# EAGLE board Outlet_Sensor (EAGLE 7.5.0)
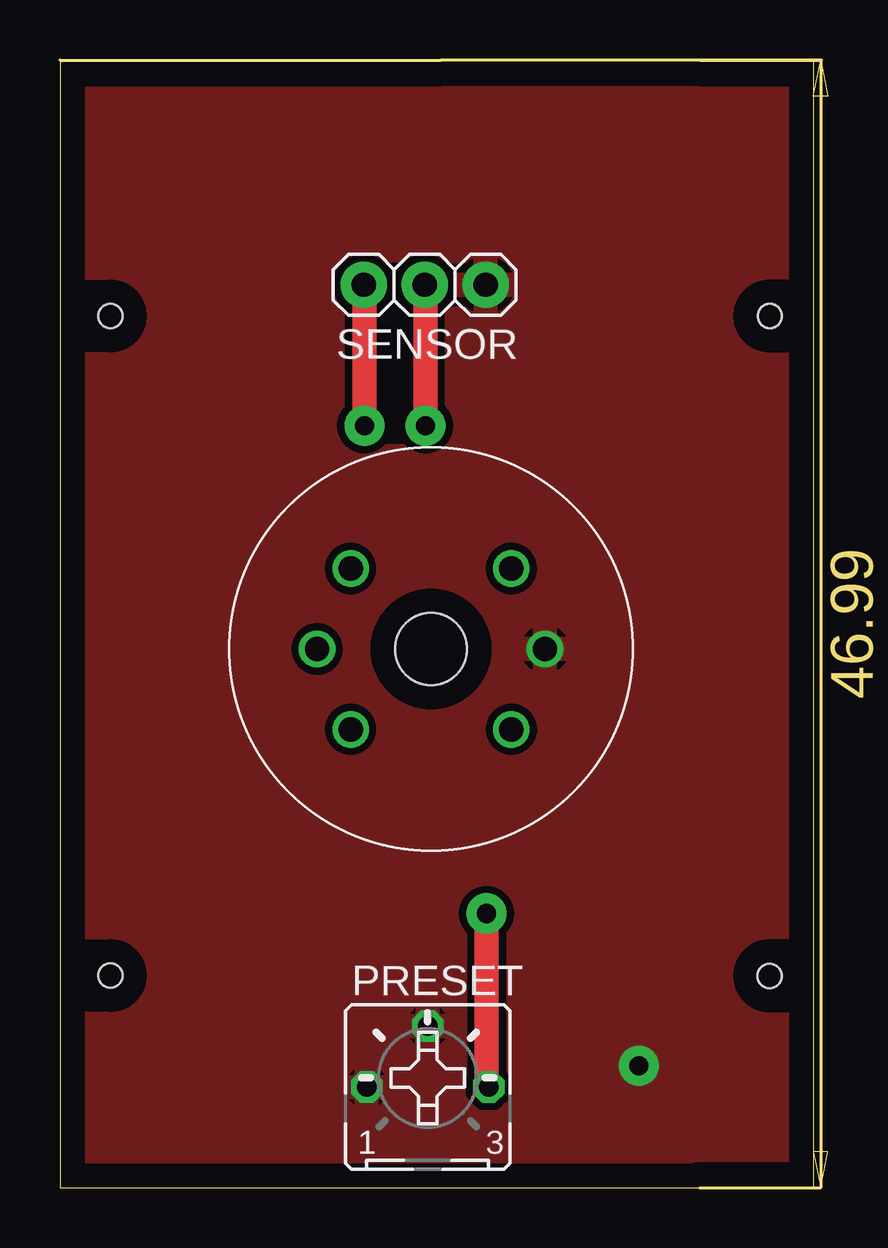
[diagram p0: board, top side]
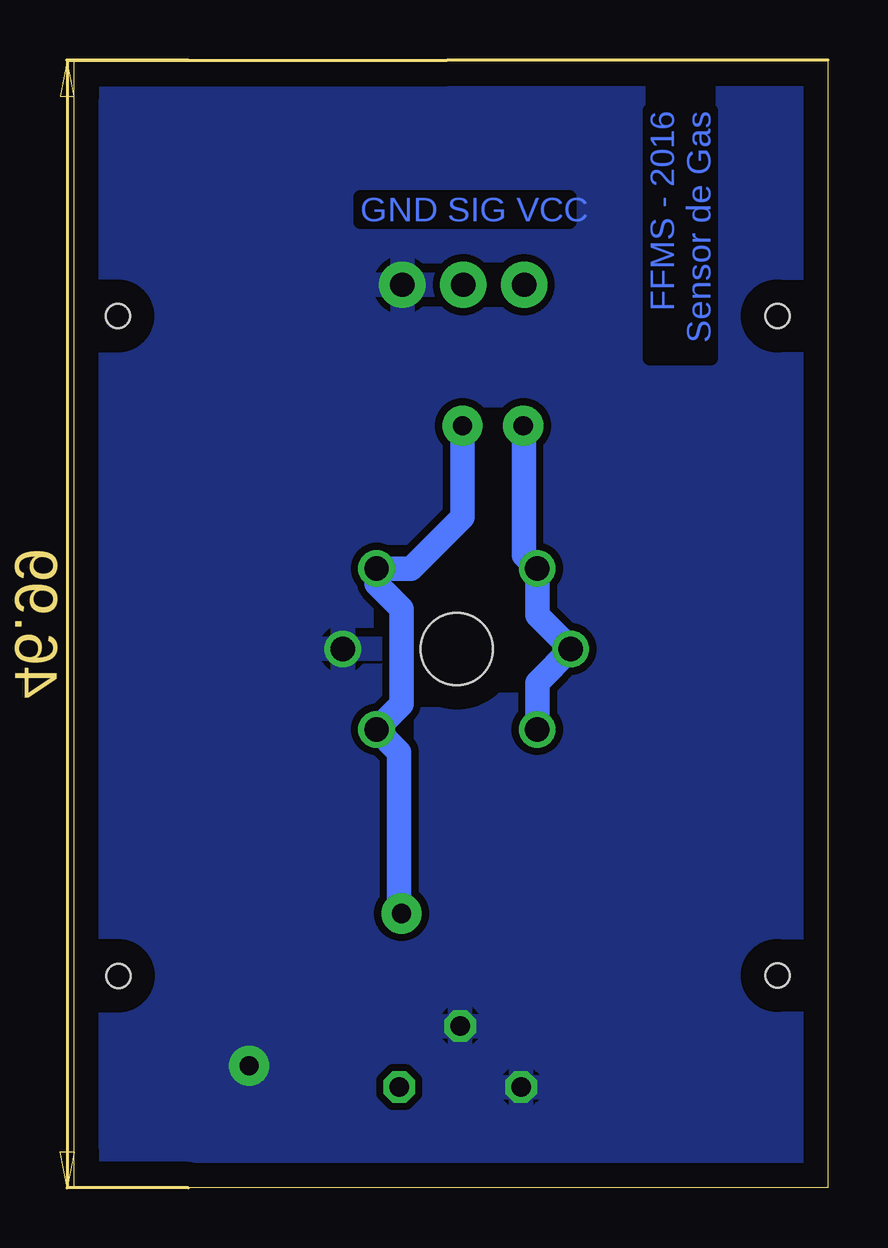
[diagram p1: board, bottom side, seen from below]

Size 31.42 x 46.98 mm. Coordinates in mm from the lower left corner, seen from the top.
Outline: 0,0 31.42,0 31.42,46.98 0,46.98 0,0
Copper layers (1*16): Top 0.035mm / dielectric 1.5mm / Bottom 0.035mm
Design rules "default": minimum track width 10mil, minimum drill 24mil, track to track 8mil, track to pad 8mil, pad to pad 8mil, via to via 8mil, smd to smd 8mil, copper to edge 40mil, drill to drill 8mil, minimum pad ring 10mil, minimum via ring 8mil, stop-mask expansion 4mil, vias tented up to drill 0mil, thermal gap 10mil
Holes 1 mm at 2.11,36.32 29.6,36.33 29.58,8.83 2.1,8.84

## Footprints (pad centres in the part's own frame; a part is rotated, then mirrored left to right if it is on the bottom)
B25P = drill 0.813 octagon: A -2.54,0; E 2.54,0; S 0,2.54
1X03 = drill 1.016 pad 1.93: 1 -2.54,0; 4 0,0; 5 2.54,0 | drill 1.016: 2 0,0; 3 2.54,0
MQ-3 = drill 1.016: A1 -3.35,3.35; A2 -3.35,-3.35; B1 3.35,3.35; B2 3.35,-3.35; HA -4.75,0; HB 4.75,0 | hole 3: 0,0

## Placement (x,y rotation side)
PRESET  [B25P]  15.33,4.2 0 top
SENSOR  [1X03]  15.2,37.62 180 top
U$1  METHANE_SENSOR  [MQ-3]  15.47,22.45 0 top

## Library data of the parts
PRESET = pot
SENSOR = adafruit
U$1 = SparkFun-Sensors

## Nets
GND: PRESET.A PRESET.S SENSOR.1 U$1.HB
N$1: SENSOR.3 U$1.A1 U$1.A2 U$1.HA
N$4: PRESET.E SENSOR.2 U$1.B1 U$1.B2

## Tracks (layer width: path | path; a pad name or v marks a point on that pad's centre or on a via)
GND  (via drill 0.8 pad 1.68)
  other vias: 24.13,5.08
  pour Bottom (isolate 0.305): 0,46.99 31.75,46.99 31.75,0 0,0
  pour Top (isolate 0.305): 0,46.99 31.75,46.99 31.75,0 0,0
N$1  (via drill 0.8 pad 1.68)
  Top 1.016: v12.7,31.75 12.7,37.59 SENSOR.3
  Bottom 1.016: U$1.A2 12.12,21.05 U$1.HA 12.12,23.85 U$1.A1 12.66,26.35 12.66,31.71 v12.7,31.75
N$4  (via drill 0.8 pad 1.68)
  Top 1.016: v15.24,31.75 15.24,37.59 SENSOR.2 | v17.78,11.43 17.78,4.29 PRESET.E
  Bottom 1.016: v15.24,31.75 15.24,27.94 17.38,25.8 U$1.B1 18.82,25.17 17.78,24.13 17.78,20.14 U$1.B2 17.87,18.16 17.87,11.52 v17.78,11.43

## Text on the board
Bottom: FFMS - 2016 / Sensor de Gas | GND SIG VCC